# Altium PCB PA_Channel_RF2_NPTB00004A.PcbDoc
Units mm, origin at the board's own origin, x right, y up, seen from the top; angles counter-clockwise.
Board outline 40.51 x 29.51 mm, 2 copper layers (Top Layer, Bottom Layer), stack 1.071 mm thick; 25 components, 16 nets, 76 pads, 253 vias.
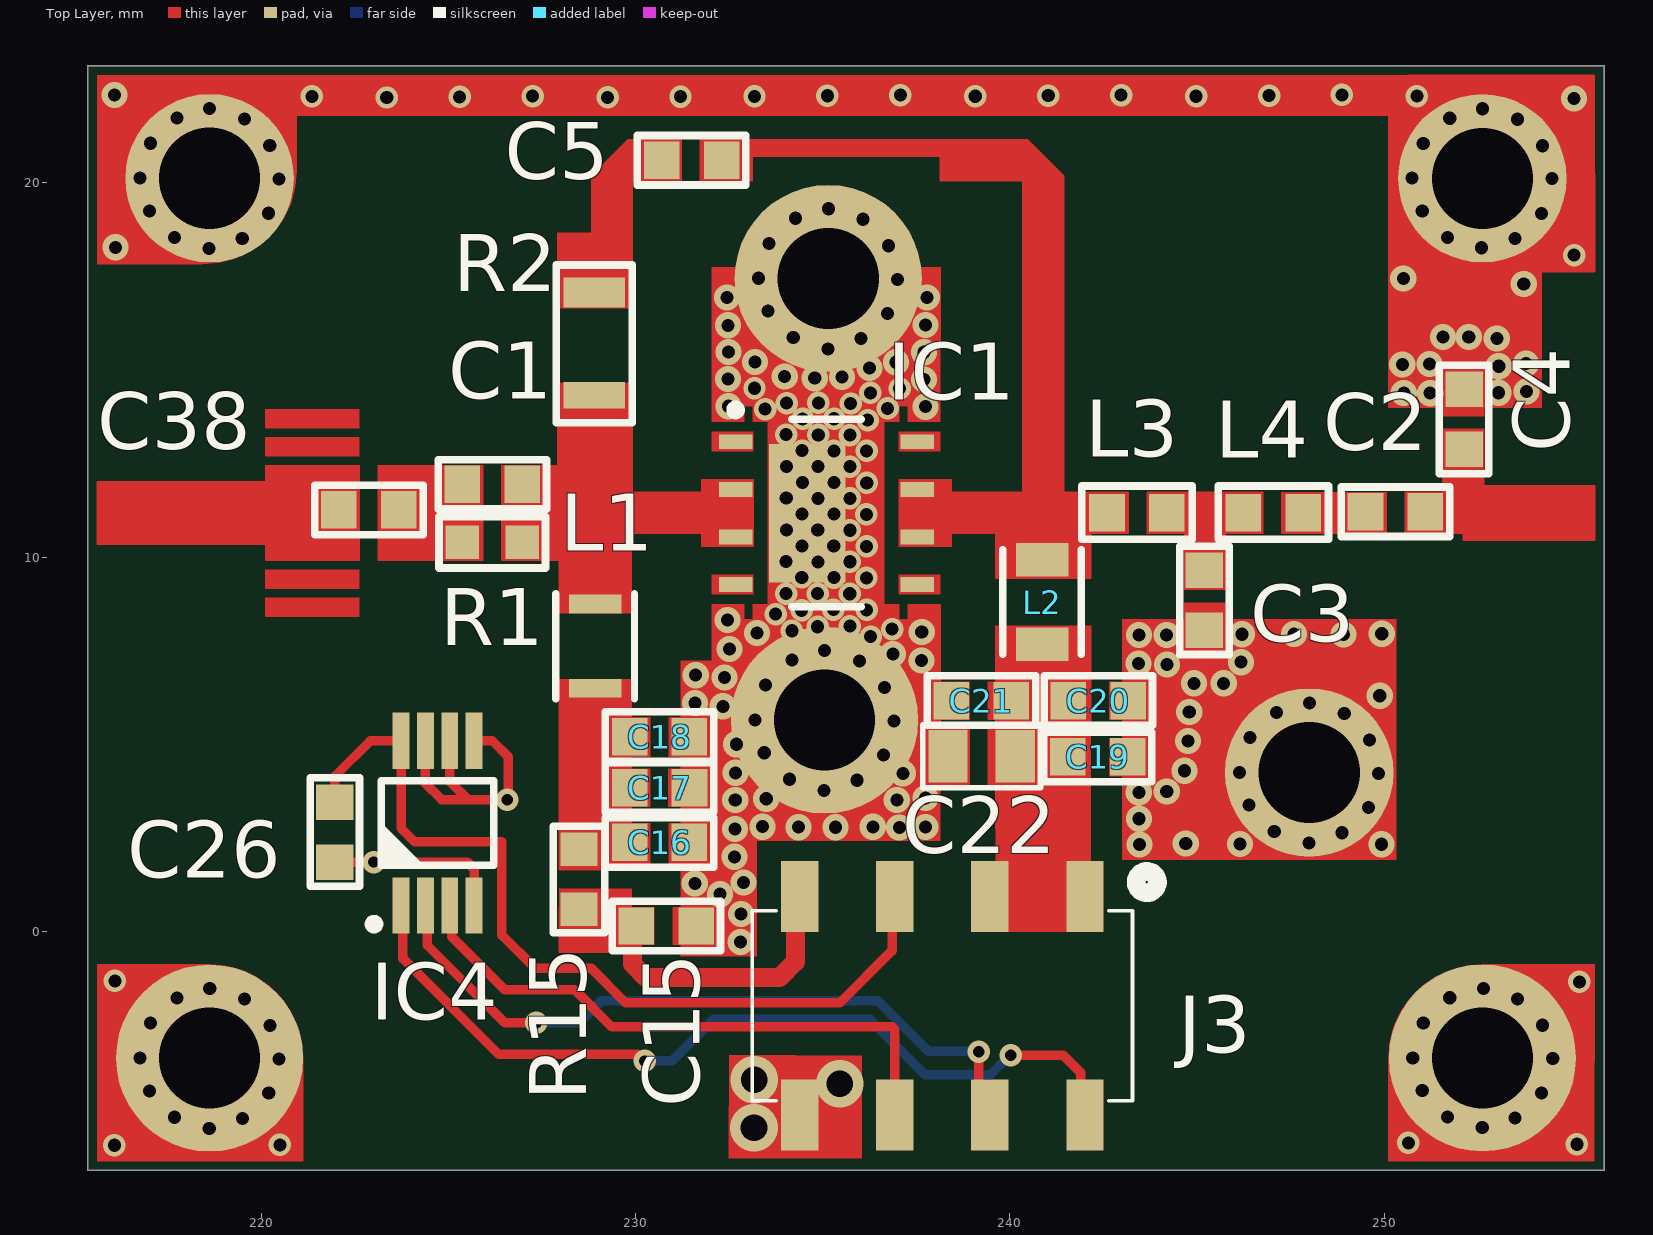
[diagram p0: Top Layer view]
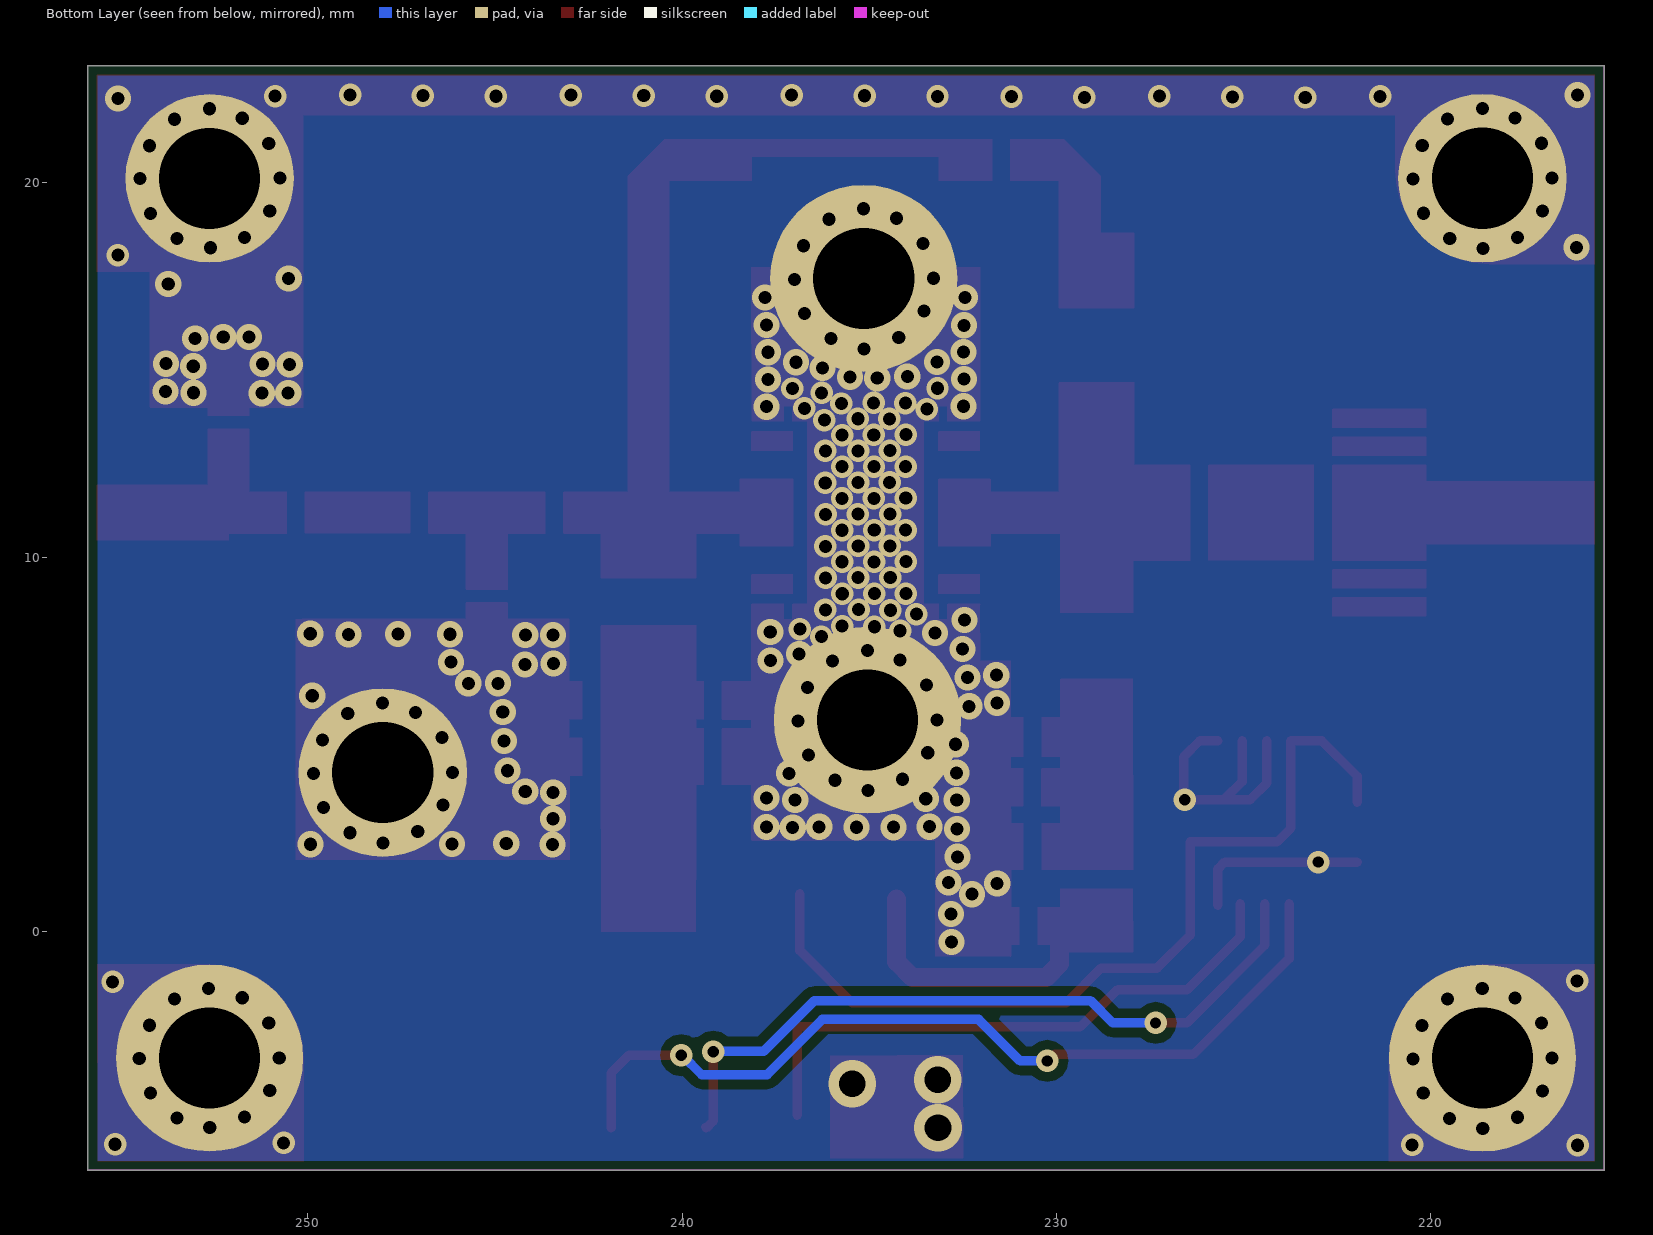
[diagram p1: Bottom Layer view, seen from below]
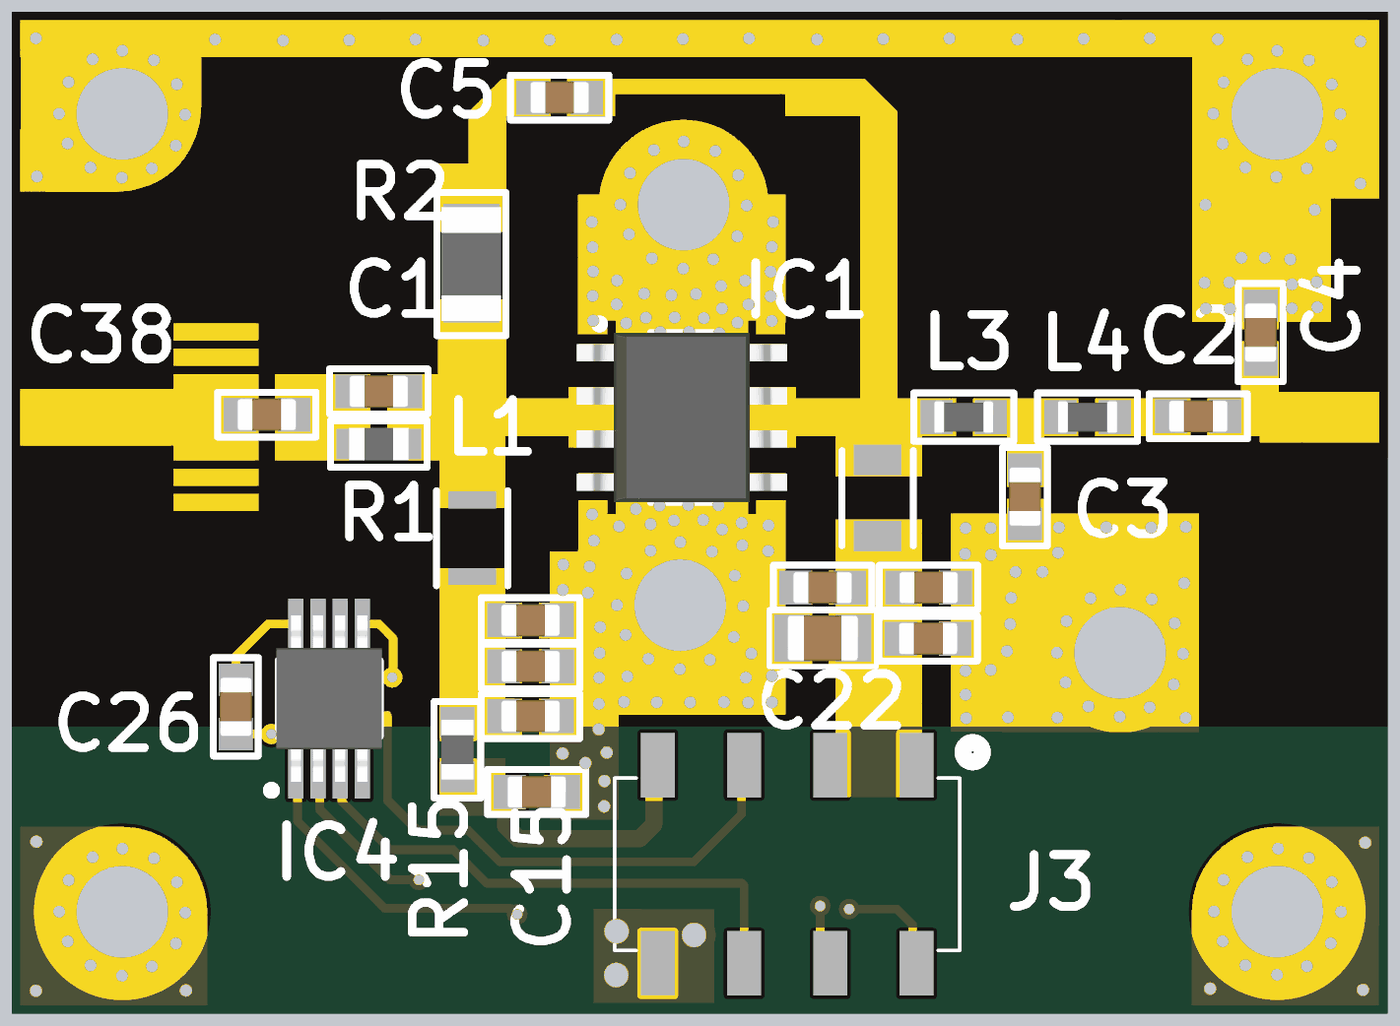
[diagram p2: 3D render of the assembled board from above, using the file's embedded part models]

## Layer stack, top to bottom
Top Solder: solder mask 0.0102, Solder Resist, Dk 3.5
Top Layer: signal copper 0.0356
Dielectric1: core 1, FR-4, Dk 4.8
Bottom Layer: signal copper 0.0356
Bottom Solder: solder mask 0.0102, Solder Resist, Dk 3.5

## Board outline
215.37,-6.375 ccw(c215.375,-6.375) 215.375,-6.38 255.875,-6.38 ccw(c255.875,-6.375) 255.88,-6.375 255.88,23.125 ccw(c255.875,23.125) 255.875,23.13 215.375,23.13 ccw(c215.375,23.125) 215.37,23.125

## Design rules (kind name [scope] priority, off if disabled: settings)
Clearance [All] p1: gap=0.25
HoleSize [All] p1: absolutevalues=TRUE maxlimit=5 minlimit=0.2 maxpercent=80.000 minpercent=20.000
HoleToHoleClearance [All] p1: gap=0.2 allowstackedmicrovias=TRUE
MinimumSolderMaskSliver [All] p1: minsoldermaskwidth=0
PolygonConnect [All] p1: connectstyle=Direct reliefconductorwidth=0.254 reliefentries=4 polygonreliefangle="90 Angle" airgapwidth=0.254
RoomDefinition Power_Stage_SOIC [InComponentClass('Power_Stage_SOIC')] p1: confinementstyle=ConfineIn formatcopy=TRUE lockcomponents=FALSE outline 257.024,-4.983 215.525,-4.983 215.525,23.175 257.024,23.175
RoutingVias [All] p1: holewidth=0.711 width=1.27 viastyle="Through Hole" minholewidth=0.2 minwidth=0.5 maxholewidth=0.711 maxwidth=1.27
SilkToSolderMaskClearance [IsPad] p1: minsilkscreentomaskgap=0 clearancetoexposedcopper=TRUE
SolderMaskExpansion [All] p1: expansion=0.102
Width [All] p1: maxlimit=2 minlimit=0.152 preferedwidth=0.254
26 further rules are at their usual default settings.

## Components (designator, comment, footprint, x,y, rotation, side; value= is the part's Value field where it differs from the comment)
C1 "3nF" 0603C 226.175,11.95 r0 top
C2 "270pF" 0603C 250.303,11.217 r0 top
C3 "2.7pF" 0603C 245.2,8.85 r270 top
C4 "0.7pF" 0603C 252.137,13.683 r90 top
C5 "27pF" 0603C 231.501,20.606 r0 top
C15 "4.7u" 0603C 230.825,0.15 r0 top
C16 "10n" 0603C 230.643,2.383 r0 top
C17 "1n" 0603C 230.645,3.848 r0 top
C18 "100p" 0603C 230.643,5.209 r0 top
C19 "10n" 0603C 242.35,4.669 r0 top
C20 "1n" 0603C 242.364,6.171 r0 top
C21 "100p" 0603C 239.241,6.171 r180 top
C22 "10u/50V" 0805C 239.248,4.683 r180 top
C26 "10n" 0603C 221.969,2.658 r90 top
C38 "220p" 0603C 222.879,11.266 r0 top
IC1 "NPTB00004A" SOIC127P610X150_HS-8N 235.101,11.181 r0 top
IC4 "MCP9801-M/MS" SOP65P490X110-8N 224.715,2.9 r90 top
J3 "ZL264-8DG" ZL264-8DG 238.2,-1.98 r180 top locked
L1 "1uH" INDP2520X18L#1 228.925,7.625 r90 top
L2 "1uH" INDP2520X18L#2 240.863,8.805 r90 top
L3 "5.7nH" 0603L 243.398,11.193 r0 top
L4 "7.2nH" 0603L 247.042,11.193 r0 top
R1 "15" 0603R#1 226.175,10.4 r0 top
R2 "470" 1206 228.9,15.7 r90 top
R15 "33" 0603R#2 228.493,1.397 r270 top

## Footprints (in the part's own frame and the unit in brackets; to place one, negate y for a bottom-side part, rotate by r counter-clockwise, add the part's x,y. Pads: shape width x height; smd on the part's side, far side on the other; paste and mask are expansions set on the pad)
0603C [mm]
  rect 0.95x1 smd: 1(-0.8,0) 2(0.8,0)
  silkscreen extent -1.45,-0.66 1.45,0.66, body extent -0.87,-0.47 0.88,0.48, height 0.87
0603L [mm]
  rect 0.95x1 smd: 1(-0.8,0) 2(0.8,0)
  silkscreen extent -1.47,-0.71 1.47,0.71, body extent -0.87,-0.47 0.88,0.48, height 0.7
0603R#1 [mm]
  rect 0.9x0.9 smd: 1(-0.8,0) 2(0.8,0)
  silkscreen extent -1.42,-0.69 1.42,0.69, body extent -0.87,-0.47 0.88,0.48, height 0.55
0603R#2 [mm]
  rect 0.9x1 smd: 1(-0.8,0) 2(0.8,0)
  silkscreen extent -1.42,-0.69 1.42,0.69, body extent -0.87,-0.47 0.88,0.48, height 0.55
0805C [mm]
  rect 1.05x1.4 smd: 1(-0.9,0) 2(0.9,0)
  silkscreen extent -1.57,-0.84 1.57,0.84, body extent -1.05,-0.67 1.05,0.68, height 1.25
1206 [mm]
  rect 0.7x1.65 smd: 1(-1.372,0)
  rect 0.8x1.65 smd: 2(1.372,0)
  silkscreen extent -2.11,-1.02 2.11,1.02, body extent -1.67,-0.87 1.68,0.88, height 0.65
INDP2520X18L#1 [mm] "Precision Wire Wound Inductor, 2-Leads, Body 2.5x2.0mm, IPC High Density"
  rect 0.5x1.4 smd: 1(-1.125,0) 2(1.125,0)
  silkscreen extent -1.4,-1.05 1.4,1.05, body extent -1.35,-1.05 1.35,1.05, height 1.8
INDP2520X18L#2 [mm] "Precision Wire Wound Inductor, 2-Leads, Body 2.5x2.0mm, IPC High Density"
  rect 0.9x1.4 smd: 1(-1.125,0) 2(1.125,0)
  silkscreen extent -1.4,-1.05 1.4,1.05, body extent -1.35,-1.05 1.35,1.05, height 1.8
SOIC127P610X150_HS-8N [mm] "SOIC, 8-Leads, Body 5.0x3.9mm (max), Pitch 1.27mm, IPC Medium Density"
  rect 0.9x0.4 smd: 1(-2.425,1.905) 2(-2.425,0.635) 3(-2.425,-0.635) 4(-2.425,-1.905) 5(2.425,-1.905) 6(2.425,-0.635) 7(2.425,0.635) 8(2.425,1.905)
  rect 2.05x3.7 smd: 9(-0.508,0)
  silkscreen extent -2.55,-2.5 0.93,2.88, body extent -3.1,-2.5 3.1,2.5, height 1.75
SOP65P490X110-8N [mm] "SOP, 0.65mm pitch; 8 pin, 3.00mm W X 3.00mm L X 1.10mm H body, IPC Medium Density"
  rect 1.5x0.45 smd: 1(-2.2,0.975) 2(-2.2,0.325) 3(-2.2,-0.325) 4(-2.2,-0.975) 5(2.2,-0.975) 6(2.2,-0.325) 7(2.2,0.325) 8(2.2,0.975)
  silkscreen extent -2.82,-1.5 1.12,1.82, body extent -2.45,-1.55 2.45,1.55, height 1.1
ZL264-8DG [mm]
  rect 1x1.9 smd: 1(-3.81,-2.921) 2(-3.81,2.921) 3(-1.27,-2.921) 4(-1.27,2.921) 5(1.27,-2.921) 6(1.27,2.921) 7(3.81,-2.921) 8(3.81,2.921)
  silkscreen extent -5.74,-3.59 5.08,2.54, body extent -5.08,-3.56 5.08,3.56, height 7.5

## Part data
C1 C2 C3 C4 C5 C15 C16 C17 C18 C19 C20 C21 C26 C38: library part CAP_SMD_0603, "Capacitor SMD"
C22: library part CAP_SMD_0805, "Capacitor SMD"
IC1: library part RF_NPTB00004A, "GaN Wideband Transistor 28 V, 5 W DC  - 6 GHz"
IC4: "2-Wire High-Accuracy Temperature Sensor"
J3: library part "CON_2X4 2.54 SMT FEM", "2.54mm pitch connector"
L2: "100uH, 60mA, 21R"
L3 L4: library part L_0603, "SMT inductor"
R1 R2 R15: library part RES_0603, "SMD Resistor"

## Free pads (board coordinates)
  round 5 hole 2.7 unplated: 2(235.05,5.65) 6(218.625,-3.38) 6(252.625,-3.375) 13(235.15,17.45)
  round 4.5 hole 2.7 unplated: 4(248,4.25) 6(218.623,20.125) 6(252.625,20.122)

## Via types
v1: diameter 0.7, hole 0.35, Top Layer to Bottom Layer, tented both sides, 168 vias
v2: diameter 0.6, hole 0.35, Top Layer to Bottom Layer, tented both sides, 76 vias
v3: diameter 0.6, hole 0.3, Top Layer to Bottom Layer, tented both sides, 4 vias
v4: diameter 1.27, hole 0.711, Top Layer to Bottom Layer, tented both sides, 3 vias
v5: diameter 0.6, hole 0.3, Top Layer to Bottom Layer, 2 vias

## Nets (pads, with @x,y where several pads share a name; then routed paths per layer and width w, separated by ;. In a path a pad name is that pad's centre, name@x,y a point inside that pad or via, vN(x,y) a via of type N, cw(c..) or ccw(c..) an arc to the next point about the centre after c; other vN are vias at no path point)
ALERT: IC4.3 J3.6 | length 16
  Top Layer w0.254: IC4.3@225.087,0.739 225.087,-0.131 226.505,-1.549 228.371,-1.549 229.362,-2.54 236.855,-2.54 236.931,-2.616 J3.6@236.931,-4.902
GND: C3.2 C4.2 C15.2 C16.2 C17.2 C18.2 C19.2 C20.2 C21.2 C22.2 C26.1 IC1.9 IC4.4 IC4.5 IC4.6 IC4.7 J3.8 pad.2 pad.4 pad.6 pad.13 | length 297.6
  Top Layer w0.01: pad.6@217.207,21.808 250.128,21.808 250.128,14.004 252.628,14.004 ; 220.236,22.08 222.436,22.08 227.456,22.08 228.536,22.08 ; 221.128,22.883 215.628,22.883 250.636,22.883 250.636,22.862 250.878,22.883 255.628,22.883 255.628,17.633 254.205,17.633 254.205,14.004 252.628,14.004 ; 226.135,22.084 228.335,22.084 233.355,22.084 234.435,22.084 ; 229.928,21.808 229.928,22.882 231.228,22.882 231.228,21.808 ; 230.893,2.149 231.893,2.149 231.893,3.149 ; 230.893,5.549 231.893,5.549 231.893,4.549 ; 231.217,-0.669 231.217,7.228 232.048,7.228 232.048,8.739 232.903,8.739 232.903,8.337 233.153,8.337 233.153,8.739 237.043,8.739 237.043,8.337 237.293,8.337 237.293,8.739 238.148,8.739 238.148,2.434 233.65,2.434 ; 231.728,21.808 231.728,22.882 ; 231.893,-0.351 C15.2@231.893,0.649 ; 231.898,22.55 232.978,22.55 237.998,22.55 240.198,22.55 ; 232.048,14.844 233.128,14.844 ; 232.048,17.334 pad.13@233.128,17.334 ; 232.048,21.808 232.048,22.882 ; pad.13@233.128,17.734 232.048,17.734 232.048,13.639 232.903,13.639 232.903,14.041 233.153,14.041 233.153,13.639 237.043,13.639 237.043,14.041 237.293,14.041 237.293,13.639 238.148,13.639 ; 233.128,21.808 233.128,22.882 ; 233.553,8.739 233.553,13.639 ; 236.643,8.739 236.643,13.639 ; 237.797,22.551 238.877,22.551 243.897,22.551 246.097,22.551 ; 238.148,21.808 238.148,22.882 ; 240.348,21.808 240.348,22.882 ; 243.695,22.554 244.775,22.554 249.795,22.554 251.995,22.554 ; pad.6@252.628,18.933 252.628,14.004 ; 230.893,3.349 231.893,3.349 231.893,4.349 230.893,4.349 230.893,3.349 ; IC1.9@233.953,9.604 233.953,12.774 236.243,12.774 236.243,9.604 IC1.9@233.953,9.604 ; 237.928,3.919 237.928,5.419 238.928,5.419 238.928,3.919 237.928,3.919 ; 237.928,5.669 237.928,6.669 238.928,6.669 238.928,5.669 237.928,5.669 ; 242.668,4.169 242.668,5.169 243.668,5.169 243.668,4.169 242.668,4.169 ; 242.668,5.669 243.668,5.669 243.668,6.669 242.668,6.669 242.668,5.669 ; 243.016,2.19 243.016,8.347 250.154,8.347 250.154,2.19 243.016,2.19 ; 244.668,8.279 244.668,8.779 245.768,8.779 245.768,8.279 244.668,8.279 ; C3.2@245.018,7.879 245.418,7.879 245.418,8.679 245.018,8.679 C3.2@245.018,7.879 ; 251.568,13.784 251.568,14.284 252.668,14.284 252.668,13.784 251.568,13.784 ; 251.918,13.884 252.318,13.884 252.318,14.684 251.918,14.684 251.918,13.884
  Top Layer w0.254: C26.1 v5(223.01,1.858) 225.509,1.858 225.69,1.677 IC4.4 ; IC4.7 224.39,3.96 224.825,3.525 225.525,3.525 ; IC4.6 225.04,4.01 225.525,3.525 ; IC4.5 226.175,5.1 226.6,4.675 226.6,3.525 v5@226.575,3.5 ; v5(226.575,3.525) 225.525,3.525
  Top Layer w1: v4(233.167,-5.243) J3.8@234.272,-5.243
  other v1: 232.808,-0.274 232.819,0.474 232.257,1.001 231.587,1.284 232.886,1.312 232.65,1.998 243.468,2.325 244.7,2.351 246.154,2.342 249.931,2.334 247.99,2.369 248.873,2.643 247.066,2.671 232.657,2.745 237.05,2.785 233.394,2.804 234.36,2.79 235.344,2.789 236.341,2.799 237.752,2.791 243.451,3.016 249.579,3.316 246.393,3.377 232.666,3.517 236.983,3.518 233.494,3.55 237.747,3.57 243.447,3.719 244.193,3.745 235.04,3.769 235.923,4.043 234.116,4.071 237.143,4.229 249.854,4.225 232.677,4.242 246.14,4.254 244.669,4.297 236.629,4.716 233.443,4.777 232.695,5.005 244.763,5.095 249.608,5.123 246.421,5.184 236.904,5.625 233.19,5.654 248.934,5.829 247.127,5.858 244.794,5.868 232.334,6.019 231.594,6.106 248.004,6.11 249.884,6.302 236.658,6.523 233.471,6.584 244.921,6.633 245.714,6.633 232.383,6.79 231.609,6.851 244.197,7.132 243.436,7.164 246.175,7.198 235.984,7.229 237.641,7.247 234.177,7.258 236.875,7.419 235.054,7.51 232.51,7.551 243.454,7.925 244.191,7.925 248.917,7.94 246.201,7.944 247.591,7.948 249.936,7.957 233.25,7.976 237.648,8.003 232.459,8.328 232.486,14.035 237.746,14.024 250.526,14.389 251.23,14.384 253.057,14.395 253.806,14.429 232.474,14.761 237.712,14.75 234.79,14.785 235.515,14.819 233.987,14.83 236.252,15.054 253.063,15.104 250.486,15.15 251.213,15.161 253.789,15.172 233.19,15.217 236.959,15.211 232.486,15.482 237.712,15.476 235.14,15.569 236.023,15.843 253.011,15.842 234.216,15.871 251.57,15.887 252.262,15.887 232.469,16.197 237.751,16.208 236.729,16.516 233.543,16.577 232.449,16.938 237.785,16.94 253.73,17.297 237.004,17.425 233.29,17.454 250.513,17.448 218.613,18.244 252.6,18.268 216.111,18.28 236.758,18.323 233.571,18.384 219.495,18.518 253.498,18.514 217.689,18.546 251.691,18.543 236.084,19.029 234.277,19.058 220.202,19.192 254.204,19.188 217.015,19.253 251.017,19.249 235.154,19.31 220.476,20.101 216.763,20.129 250.744,20.132 254.485,20.118 254.232,20.995 220.23,20.998 217.043,21.059 251.046,21.056 219.556,21.705 253.559,21.701 217.75,21.733 251.752,21.729 218.626,21.985 252.629,21.982 255.075,22.258 216.084,22.352
  other v2: 216.082,-5.706 220.502,-5.697 255.15,-5.68 250.65,-5.643 255.216,-1.344 216.095,-1.315 236.284,7.883 234.179,8.038 236.858,8.079 234.868,8.145 235.727,8.163 233.743,8.483 234.44,8.584 236.175,8.595 235.289,8.604 234.026,9.029 234.866,9.032 235.726,9.027 234.444,9.46 235.302,9.457 236.172,9.449 234.023,9.884 234.873,9.877 235.727,9.88 235.298,10.302 236.174,10.292 234.453,10.307 234.031,10.725 234.871,10.728 235.731,10.723 234.449,11.156 235.307,11.153 236.171,11.147 234.878,11.573 234.028,11.58 235.732,11.576 234.458,12.003 235.303,11.998 236.179,11.988 234.03,12.423 234.877,12.424 235.73,12.423 235.299,12.841 236.176,12.843 234.452,12.85 234.882,13.27 235.727,13.263 234.027,13.277 236.202,13.663 234.464,13.697 235.309,13.701 233.462,13.958 236.736,13.976 235.746,14.108 234.038,14.121 234.886,14.126 236.278,14.392 233.18,14.516 237.059,14.509 255.074,18.07 223.357,22.283 229.256,22.287 221.356,22.314 225.305,22.3 227.255,22.318 231.204,22.304 233.181,22.313 239.078,22.316 244.977,22.317 235.129,22.33 241.028,22.331 246.926,22.334 250.875,22.32 237.077,22.347 242.976,22.348 248.874,22.351
  other v4: 235.458,-4.064 233.177,-3.953
NetC1_1: C1.1 C38.2 R1.1 | length 10.7
  Top Layer w0.01: 223.128,9.919 223.128,12.459 225.928,12.459 225.928,9.919 223.128,9.919
NetC1_2: C1.2 IC1.2 IC1.3 L1.2 R1.2 R2.1 | length 54.1
  Top Layer w0.01: 227.928,9.919 226.428,9.919 226.428,12.459 227.928,12.459 ; 227.928,9.919 227.928,12.459 ; 227.928,9.919 229.893,9.919 ; 227.928,9.919 227.928,12.459 ; 227.928,12.459 229.928,12.459 ; 227.928,12.459 227.928,14.659 229.928,14.659 229.928,12.459 ; 227.928,12.459 229.928,12.459 ; 229.893,9.919 229.893,8.519 227.963,8.519 227.963,9.919 229.893,9.919 ; 229.893,9.919 229.893,10.639 229.928,10.639 ; 229.928,10.639 229.928,12.459 ; 229.928,10.639 231.768,10.639 231.768,11.739 229.928,11.739 229.928,10.639 ; 232.048,10.299 231.768,10.299 231.768,12.079 232.048,12.079 ; 232.048,10.299 232.048,12.079 ; 232.048,10.299 233.153,10.299 233.153,12.079 232.048,12.079 ; 232.048,10.299 232.048,12.079 ; 232.048,10.349 232.048,10.759 233.153,10.759 233.153,10.349 232.048,10.349 ; 232.048,11.619 232.048,12.029 233.153,12.029 233.153,11.619 232.048,11.619
NetC2_1: C2.1 L4.2 | length 7.8
  Top Layer w0.01: 247.268,10.639 250.068,10.639 250.068,11.739 247.268,11.739 247.268,10.639
NetC2_2: C2.2 C4.1 | length 23.4
  Top Layer w0.01: 251.568,10.639 252.118,10.639 252.118,10.454 252.668,10.454 ; 251.568,10.639 251.568,11.924 ; 251.568,10.639 250.568,10.639 250.568,11.739 251.568,11.739 251.568,10.639 ; 251.568,11.924 252.668,11.924 ; 251.568,11.924 251.568,13.424 252.668,13.424 252.668,11.924 ; 251.568,11.924 252.668,11.924 ; 252.668,10.454 252.668,11.924 ; 252.668,10.454 252.668,11.924 ; 252.668,10.454 255.628,10.454 255.628,11.924 252.668,11.924
NetC3_1: C3.1 L3.2 L4.1 | length 18
  Top Layer w0.01: 244.668,10.639 245.768,10.639 ; 244.668,10.639 244.668,9.139 245.768,9.139 245.768,10.639 ; 244.668,10.639 244.668,11.739 ; 244.668,10.639 245.768,10.639 ; 244.668,10.639 243.668,10.639 243.668,11.739 244.668,11.739 ; 244.668,10.639 244.668,11.739 ; 244.668,11.739 245.768,11.739 ; 245.768,10.639 246.768,10.639 246.768,11.739 245.768,11.739 ; 245.768,10.639 245.768,11.739 ; 245.768,10.639 245.768,11.739
NetC5_1: C5.1 R2.2 | length 21.6
  Top Layer w0.01: 228.828,20.059 229.928,20.059 ; 228.828,20.059 228.828,20.191 229.796,21.159 229.928,21.159 ; 228.828,20.059 229.928,20.059 ; 228.828,20.059 228.828,18.659 229.928,18.659 ; 229.928,18.659 229.928,16.659 227.928,16.659 227.928,18.659 229.928,18.659 ; 229.928,18.659 229.928,20.059 ; 229.928,20.059 229.928,21.159 ; 229.928,20.059 231.228,20.059 231.228,21.159 229.928,21.159 ; 229.928,20.059 229.928,21.159
NetC5_2: C5.2 IC1.6 IC1.7 L2.2 L3.1 | length 86.9
  Top Layer w0.01: 232.048,20.059 233.128,20.059 233.128,21.159 ; 232.048,20.059 232.048,21.159 ; 232.048,20.059 231.728,20.059 231.728,21.159 232.048,21.159 ; 232.048,20.059 232.048,21.159 ; 232.048,21.159 233.128,21.159 ; 233.128,21.159 238.148,21.159 ; 233.128,21.159 233.128,20.709 238.148,20.709 238.148,21.159 ; 238.148,10.299 237.043,10.299 237.043,12.079 238.148,12.079 ; 238.148,10.299 238.148,12.079 ; 238.148,10.299 238.448,10.299 238.448,12.079 238.148,12.079 ; 238.148,10.299 238.148,12.079 ; 238.148,21.159 240.348,21.159 ; 238.148,21.159 238.148,20.059 240.348,20.059 ; 239.628,10.639 242.168,10.639 ; 239.628,10.639 239.628,11.739 ; 239.628,10.639 238.448,10.639 238.448,11.739 239.628,11.739 ; 239.628,10.639 239.628,11.739 ; 239.628,10.639 242.168,10.639 ; 239.628,10.639 239.628,9.439 242.168,9.439 242.168,10.639 ; 239.628,11.739 242.168,11.739 ; 240.348,20.059 241.448,20.059 ; 240.348,20.059 240.348,11.739 241.448,11.739 241.448,20.059 ; 240.348,20.059 240.348,21.159 ; 240.348,20.059 241.448,20.059 ; 240.348,20.059 240.348,21.159 ; 240.348,21.159 240.48,21.159 241.448,20.191 241.448,20.059 ; 242.168,10.639 242.168,11.739 ; 242.168,10.639 242.168,11.739 ; 242.168,10.639 243.168,10.639 243.168,11.739 242.168,11.739 ; 237.043,10.349 237.043,10.759 238.148,10.759 238.148,10.349 237.043,10.349 ; 237.043,11.619 237.043,12.029 238.148,12.029 238.148,11.619 237.043,11.619
NetC16_1: C16.1 C17.1 C18.1 L1.1 R15.1 | length 28.6
  Top Layer w0.01: 230.393,2.149 C16.1@229.893,2.149 ; 230.393,5.549 C18.1@229.893,5.549 ; 227.963,2.149 227.963,1.649 229.893,1.649 C16.1@229.893,2.149 ; 227.963,2.149 C16.1@229.893,2.149 ; 227.963,2.149 227.963,3.149 ; 227.963,3.149 227.963,3.349 ; 227.963,3.149 229.893,3.149 ; 227.963,3.349 227.963,4.349 ; 227.963,3.349 C17.1@229.893,3.349 ; 227.963,4.349 229.893,4.349 ; 227.963,4.349 227.963,4.549 ; 227.963,4.549 229.893,4.549 ; 227.963,4.549 227.963,5.549 ; 227.963,5.549 227.963,6.739 229.893,6.739 C18.1@229.893,5.549 ; 227.963,5.549 C18.1@229.893,5.549 ; C16.1@229.893,2.149 229.893,3.149 ; 229.893,3.149 C17.1@229.893,3.349 ; C17.1@229.893,3.349 229.893,4.349 ; C17.1@229.893,3.349 230.393,3.349 230.393,4.349 229.893,4.349 ; 229.893,4.349 229.893,4.549 ; 229.893,4.549 C18.1@229.893,5.549
NetC38_1: C38.1 | length 31.8
  Top Layer w0.01: 215.628,10.354 215.628,12.024 ; 215.628,10.354 218.628,10.354 218.628,12.024 215.628,12.024 ; 215.628,10.354 215.628,12.024 ; 215.628,10.354 220.128,10.354 220.128,12.024 215.628,12.024 ; 220.128,9.919 220.128,12.459 222.628,12.459 222.628,9.919 220.128,9.919
P3V3: C26.2 IC4.8 J3.5 | length 23.8
  Top Layer w0.254: C26.2 221.969,4.15 222.919,5.1 IC4.8 223.74,2.76 224.1,2.4 226.425,2.4 226.43,2.405 226.43,-0.091 227.314,-0.975 228.813,-0.975 229.743,-1.905 235.458,-1.905 236.855,-0.508 J3.5@236.855,1.016
SCK: IC4.2 J3.4 | length 19.7
  Top Layer w0.254: IC4.2@224.437,0.739 224.437,-0.363 226.512,-2.438 v3(227.355,-2.438) 227.381,-2.438 v3@227.406,-2.413 ; v3(239.17,-3.208) 239.17,-5.061 239.352,-5.243 J3.4@239.374,-5.221
  Bottom Layer w0.254: v3(227.355,-2.438) 228.498,-2.438 229.094,-1.843 236.469,-1.843 237.819,-3.193 v3@239.2,-3.193
SDA: IC4.1 J3.2 | length 23.7
  Top Layer w0.254: IC4.1@223.787,0.739 223.787,-0.721 226.343,-3.277 230.048,-3.277 v3@230.251,-3.48 ; v3(240.025,-3.3) 241.425,-3.3 241.892,-3.767 J3.2@241.892,-5.243
  Bottom Layer w0.254: v3(230.251,-3.454) 230.975,-3.454 232.082,-2.347 236.26,-2.347 237.735,-3.822 239.48,-3.822 v3@239.995,-3.307 ; v3@240.006,-3.319 240.012,-3.313 240.025,-3.325 v3(240.025,-3.3)
VCC_PWRAMP: C19.1 C20.1 C21.1 C22.1 J3.1 J3.3 L2.1 | length 42
  Top Layer w0.01: 239.628,3.919 242.168,3.919 ; 239.628,3.919 239.628,5.419 ; 239.628,3.919 239.428,3.919 239.428,5.419 239.628,5.419 ; 239.628,3.919 239.628,5.419 ; 239.628,3.919 239.628,2.749 242.168,2.749 242.168,3.919 ; 239.628,3.919 242.168,3.919 ; 239.628,5.419 242.168,5.419 ; 239.628,5.419 239.628,5.669 ; 239.628,5.419 242.168,5.419 ; 239.628,5.669 242.168,5.669 ; 239.628,5.669 C21.1@239.628,6.669 ; 239.628,5.669 242.168,5.669 ; 239.628,5.669 239.428,5.669 239.428,6.669 C21.1@239.628,6.669 ; 239.628,5.669 C21.1@239.628,6.669 ; C21.1@239.628,6.669 239.628,8.169 242.168,8.169 242.168,6.669 ; C21.1@239.628,6.669 242.168,6.669 ; C21.1@239.628,6.669 242.168,6.669 ; 242.168,3.919 242.168,5.419 ; 242.168,5.419 242.168,5.669 ; 242.168,5.669 242.168,6.669
VCC_PWRAMPIN: C15.1 J3.7 R15.2 | length 14.4
  Top Layer w0.01: 227.963,-0.551 229.893,-0.551 229.893,-0.351 227.963,-0.351 227.963,0.649 C15.1@229.893,0.649
  Top Layer w0.508: C15.1@229.916,0.157 229.916,-0.862 230.28,-1.226 233.851,-1.226 234.272,-0.805 J3.7@234.272,0.869
pads on no net: IC1.1 IC1.4 IC1.5 IC1.8
copper on no net: | length 63.1
  Top Layer w0.01: -59.9,-120.25 -59.866,-119.859 -59.764,-119.48 -59.599,-119.125 -59.374,-118.804 -59.096,-118.526 -58.775,-118.301 -58.42,-118.136 -58.041,-118.034 -57.65,-118 -57.259,-118.034 -56.88,-118.136 -56.525,-118.301 -56.204,-118.526 -55.926,-118.804 -55.701,-119.125 -55.536,-119.48 -55.434,-119.859 -55.4,-120.25 -55.434,-120.641 -55.536,-121.02 -55.701,-121.375 -55.926,-121.696 -56.204,-121.974 -56.525,-122.199 -56.88,-122.364 -57.259,-122.466 -57.65,-122.5 -58.041,-122.466 -58.42,-122.364 -58.775,-122.199 -59.096,-121.974 -59.374,-121.696 -59.599,-121.375 -59.764,-121.02 -59.866,-120.641 -59.9,-120.25 ; 220.128,8.427 220.128,8.923 222.628,8.923 222.628,8.427 220.128,8.427 ; 220.128,9.173 220.128,9.669 222.628,9.669 222.628,9.173 220.128,9.173 ; 220.128,12.709 220.128,13.205 222.628,13.205 222.628,12.709 220.128,12.709 ; 220.128,13.455 220.128,13.951 222.628,13.951 222.628,13.455 220.128,13.455 ; 232.048,9.029 233.153,9.029 233.153,9.539 232.048,9.539 232.048,9.029 ; 232.048,9.079 232.048,9.489 233.153,9.489 233.153,9.079 232.048,9.079 ; 232.048,12.839 233.153,12.839 233.153,13.349 232.048,13.349 232.048,12.839 ; 232.048,12.889 232.048,13.299 233.153,13.299 233.153,12.889 232.048,12.889 ; 237.043,9.029 238.148,9.029 238.148,9.539 237.043,9.539 237.043,9.029 ; 237.043,9.079 237.043,9.489 238.148,9.489 238.148,9.079 237.043,9.079 ; 237.043,12.839 238.148,12.839 238.148,13.349 237.043,13.349 237.043,12.839 ; 237.043,12.889 237.043,13.299 238.148,13.299 238.148,12.889 237.043,12.889
  other v1: 218.616,-5.261 252.621,-5.235 219.498,-4.988 253.498,-4.982 217.692,-4.959 251.691,-4.954 220.205,-4.314 254.204,-4.308 217.018,-4.253 251.017,-4.247 220.479,-3.405 216.765,-3.376 250.765,-3.371 254.506,-3.384 220.233,-2.507 254.232,-2.502 217.046,-2.446 251.046,-2.441 219.559,-1.801 253.559,-1.795 217.753,-1.773 251.752,-1.767 218.629,-1.52 252.65,-1.521

## Polygon pours and split planes (outlines as drawn)
no net on Top Layer "Top Layer-No Net 7" (none, pour order 19): 246.934,3.653 246.853,3.826 246.804,4.01 246.787,4.2 246.804,4.39 246.853,4.574 246.934,4.747 247.043,4.904 247.178,5.039 247.335,5.148 247.508,5.229 247.692,5.278 247.882,5.295 248.072,5.278 248.256,5.229 248.429,5.148 248.586,5.039 248.721,4.904 248.83,4.747 248.911,4.574 248.96,4.39 248.977,4.2 248.96,4.01 248.911,3.826 248.83,3.653 248.721,3.496 248.586,3.361 248.429,3.252 248.256,3.171 248.072,3.122 247.882,3.105 247.692,3.122 247.508,3.171 247.335,3.252 247.178,3.361 247.043,3.496
no net on Top Layer "Top Layer-No Net 7" (none, pour order 13): 217.674,19.6 217.594,19.773 217.545,19.957 217.528,20.147 217.545,20.337 217.594,20.522 217.674,20.695 217.784,20.851 217.919,20.986 218.075,21.096 218.248,21.176 218.433,21.225 218.623,21.242 218.813,21.225 218.997,21.176 219.17,21.096 219.326,20.986 219.461,20.851 219.571,20.695 219.652,20.522 219.7,20.337 219.717,20.147 219.7,19.957 219.652,19.773 219.571,19.6 219.461,19.444 219.326,19.309 219.17,19.199 218.997,19.118 218.813,19.07 218.623,19.053 218.433,19.07 218.248,19.118 218.075,19.199 217.919,19.309 217.784,19.444
no net on Top Layer "Top Layer-No Net 7" (none, pour order 12): 217.677,-3.905 217.597,-3.732 217.548,-3.548 217.531,-3.358 217.548,-3.168 217.597,-2.984 217.677,-2.811 217.787,-2.654 217.922,-2.519 218.078,-2.41 218.251,-2.329 218.435,-2.28 218.625,-2.263 218.816,-2.28 219,-2.329 219.173,-2.41 219.329,-2.519 219.464,-2.654 219.574,-2.811 219.654,-2.984 219.703,-3.168 219.72,-3.358 219.703,-3.548 219.654,-3.732 219.574,-3.905 219.464,-4.062 219.329,-4.197 219.173,-4.306 219,-4.387 218.816,-4.436 218.625,-4.453 218.435,-4.436 218.251,-4.387 218.078,-4.306 217.922,-4.197 217.787,-4.062
no net on Top Layer "Top Layer-No Net 7" (none, pour order 11): 253.15,-4.323 252.977,-4.403 252.793,-4.452 252.603,-4.469 252.413,-4.452 252.229,-4.403 252.056,-4.323 251.899,-4.213 251.764,-4.078 251.655,-3.922 251.574,-3.749 251.525,-3.565 251.508,-3.375 251.525,-3.184 251.574,-3 251.655,-2.827 251.764,-2.671 251.899,-2.536 252.056,-2.426 252.229,-2.346 252.413,-2.297 252.603,-2.28 252.793,-2.297 252.977,-2.346 253.15,-2.426 253.307,-2.536 253.442,-2.671 253.551,-2.827 253.632,-3 253.681,-3.184 253.698,-3.375 253.681,-3.565 253.632,-3.749 253.551,-3.922 253.442,-4.078 253.307,-4.213
no net on Top Layer "Top Layer-No Net 7" (none, pour order 10): 252.1,21.07 252.273,21.151 252.457,21.2 252.647,21.217 252.837,21.2 253.021,21.151 253.194,21.07 253.351,20.961 253.486,20.826 253.595,20.669 253.676,20.496 253.725,20.312 253.742,20.122 253.725,19.932 253.676,19.748 253.595,19.575 253.486,19.418 253.351,19.283 253.194,19.174 253.021,19.093 252.837,19.044 252.647,19.027 252.457,19.044 252.273,19.093 252.1,19.174 251.943,19.283 251.808,19.418 251.699,19.575 251.618,19.748 251.569,19.932 251.552,20.122 251.569,20.312 251.618,20.496 251.699,20.669 251.808,20.826 251.943,20.961
GND on Bottom Layer "L3-No Net" (solid, remove dead copper, pour order 34): 215.382,23.11 255.882,23.11 256.01,-6.392 215.382,-6.392

## Keep-outs
Keep-Out Layer:
  lines w0.01: 215.375,-6.375 215.375,23.125 ; 215.375,-6.375 255.875,-6.375 255.875,23.125 215.375,23.125 ; 215.375,-6.375 215.375,23.125

## Other copper
Top Layer:
  region net GND: 215.624,21.803 215.623,22.883 250.636,22.889 250.651,22.889 250.878,22.889 255.628,22.889 255.634,17.633 254.211,17.628 254.211,14.004 252.674,13.999 252.674,13.784 251.568,13.779 251.563,13.999 250.128,13.999 250.123,21.803 221.134,21.803
  region net GND: 231.212,-0.664 233.243,-0.669 233.243,2.429 238.148,2.429 238.154,8.739 237.293,8.745 237.288,8.343 237.049,8.343 237.049,8.739 233.153,8.745 233.148,8.343 232.909,8.343 232.909,8.739 232.048,8.745 232.043,7.234 231.217,7.234
  region net NetC2_1: 247.268,10.639 250.068,10.639 250.068,11.739 247.268,11.739
  region: 232.048,9.029 232.048,9.539 233.153,9.539 233.153,9.029
  region net GND: 242.668,4.169 242.668,5.169 243.668,5.169 243.668,4.169
  region net GND: 242.668,5.669 242.668,6.669 243.668,6.669 243.668,5.669
  region net GND: 237.928,3.919 238.928,3.919 238.928,5.419 237.928,5.419
  region net GND: 230.893,4.675 231.893,4.675 231.893,5.725 230.893,5.725
  region net GND: 230.893,1.65 230.893,2.9 231.893,2.9 231.893,1.65
  region net GND: 231,-0.351 231,0.649 231.893,0.649 231.893,-0.351
  region: 237.043,12.839 237.043,13.349 238.148,13.349 238.148,12.839
  region: 232.048,12.839 232.048,13.349 233.153,13.349 233.153,12.839
  region: 237.043,9.029 237.043,9.539 238.148,9.539 238.148,9.029
  region net NetC1_1: 223.128,9.919 225.928,9.919 225.928,12.459 223.128,12.459
  region: 220.128,8.427 220.128,8.923 222.628,8.923 222.628,8.427
  region: 220.128,12.709 220.128,13.205 222.628,13.205 222.628,12.709
  region: 220.128,13.455 222.628,13.455 222.628,13.951 220.128,13.951
  region: 220.128,9.173 220.128,9.669 222.628,9.669 222.628,9.173
  region net GND: 236.051,-6.066 236.051,-3.311 232.503,-3.292 232.495,-6.055
  region net GND: 243.011,1.923 250.323,1.917 250.328,8.347 243.016,8.353
  region net VCC_PWRAMP: 239.423,3.919 239.623,3.914 239.623,2.749 239.636,-0.006 242.168,-0.006 242.168,2.744 242.174,8.169 239.628,8.175 239.623,6.675 239.428,6.675 239.423,5.669 239.623,5.664 239.623,5.425 239.428,5.425
  region net VCC_PWRAMPIN: 227.958,-0.551 229.893,-0.556 229.899,-0.356 230.497,-0.356 230.502,0.648 229.899,0.655 229.899,1.149 227.963,1.155
  region net NetC16_1: 227.958,1.649 229.893,1.644 230.391,1.649 230.397,2.898 229.899,2.904 229.899,3.344 230.393,3.344 230.399,4.349 229.899,4.355 229.899,4.675 230.394,4.675 230.4,5.723 229.899,5.729 229.899,6.739 227.963,6.745
  region net GND: 232.043,13.639 232.903,13.634 232.909,14.036 233.148,14.036 233.148,13.639 237.043,13.634 237.049,14.036 237.288,14.036 237.288,13.639 238.148,13.634 238.152,17.744 232.903,17.75 232.043,17.75
  region: 250.108,-6.131 255.62,-6.133 255.63,-0.875 252.613,-0.875 252.179,-0.913 251.757,-1.027 251.361,-1.211 251.003,-1.461 250.695,-1.77 250.444,-2.128 250.259,-2.523 250.146,-2.945 250.108,-3.38
  region: 215.619,-6.131 221.123,-6.133 221.128,-3.378 221.09,-2.943 220.977,-2.521 220.793,-2.125 220.542,-1.768 220.234,-1.459 219.876,-1.208 219.48,-1.024 219.058,-0.91 218.623,-0.872 215.624,-0.872
  region net GND: 215.628,22.882 215.626,17.832 218.445,17.827 218.88,17.865 219.301,17.978 219.697,18.162 220.055,18.413 220.364,18.721 220.614,19.079 220.799,19.475 220.912,19.897 220.95,20.332 220.95,22.877
  region net GND: 250.128,13.999 251.563,13.999 251.563,13.784 ccw(c251.568,13.784) 251.568,13.779 252.668,13.779 ccw(c252.668,13.784) 252.674,13.784 252.674,13.999 254.205,13.999 ccw(c254.205,14.004) 254.211,14.004 ccw(c254.205,14.004) 254.205,14.01 252.674,14.01 252.674,14.284 ccw(c252.668,14.284) 252.668,14.29 252.324,14.29 252.324,14.684 ccw(c252.318,14.684) 252.318,14.69 251.918,14.69 ccw(c251.918,14.684) 251.913,14.684 251.913,14.29 251.568,14.29 ccw(c251.568,14.284) 251.563,14.284 251.563,14.01 250.128,14.01 ccw(c250.128,14.004)
  region net NetC2_2: 250.563,10.639 ccw(c250.568,10.639) 250.568,10.634 252.113,10.634 252.113,10.454 ccw(c252.118,10.454) 252.118,10.449 255.628,10.449 ccw(c255.628,10.454) 255.634,10.454 255.634,11.924 ccw(c255.628,11.924) 255.628,11.93 252.674,11.93 252.674,13.424 ccw(c252.668,13.424) 252.668,13.43 251.568,13.43 ccw(c251.568,13.424) 251.563,13.424 251.563,11.745 250.568,11.745 ccw(c250.568,11.739) 250.563,11.739
  region net GND: 244.663,8.279 ccw(c244.668,8.279) 244.668,8.274 245.013,8.274 245.013,7.879 ccw(c245.018,7.879) 245.018,7.874 245.418,7.874 ccw(c245.418,7.879) 245.424,7.879 245.424,8.274 245.768,8.274 ccw(c245.768,8.279) 245.774,8.279 245.774,8.779 ccw(c245.768,8.779) 245.768,8.785 244.668,8.785 ccw(c244.668,8.779) 244.663,8.779
  region net NetC3_1: 243.663,10.639 ccw(c243.668,10.639) 243.668,10.634 244.663,10.634 244.663,9.139 ccw(c244.668,9.139) 244.668,9.134 245.768,9.134 ccw(c245.768,9.139) 245.774,9.139 245.774,10.634 246.768,10.634 ccw(c246.768,10.639) 246.774,10.639 246.774,11.739 ccw(c246.768,11.739) 246.768,11.745 243.668,11.745 ccw(c243.668,11.739) 243.663,11.739
  region net GND: 232.898,8.337 ccw(c232.903,8.337) 232.903,8.332 233.153,8.332 ccw(c233.153,8.337) 233.159,8.337 233.159,8.734 237.038,8.734 237.038,8.337 ccw(c237.043,8.337) 237.049,8.337 237.049,8.739 ccw(c237.043,8.739) 237.043,8.745 236.649,8.745 236.649,13.634 237.043,13.634 ccw(c237.043,13.639) 237.049,13.639 ccw(c237.043,13.639) 237.043,13.645 233.153,13.645 ccw(c233.153,13.639) 233.153,13.634 233.548,13.634 233.548,8.745 233.153,8.745 ccw(c233.153,8.739) 233.148,8.739 233.148,8.343 232.909,8.343 232.909,8.739 ccw(c232.903,8.739) 232.903,8.745 232.048,8.745 ccw(c232.048,8.739) 232.048,8.734 232.898,8.734
  region net GND: 237.923,5.669 ccw(c237.928,5.669) 237.928,5.664 238.928,5.664 ccw(c238.928,5.669) 238.934,5.669 238.934,6.669 ccw(c238.928,6.669) 238.928,6.675 237.928,6.675 ccw(c237.928,6.669) 237.923,6.669
  region net GND: 230.888,3.349 ccw(c230.893,3.349) 230.893,3.344 231.893,3.344 ccw(c231.893,3.349) 231.899,3.349 231.899,4.349 ccw(c231.893,4.349) 231.893,4.355 230.893,4.355 ccw(c230.893,4.349) 230.888,4.349
  region net NetC5_2: 240.343,11.739 ccw(c240.348,11.739) 240.348,11.734 241.448,11.734 ccw(c241.448,11.739) 241.454,11.739 241.454,20.191 ccw(c241.448,20.191) 241.443,20.191 241.443,20.065 240.348,20.065 ccw(c240.348,20.059) 240.343,20.059
  region net NetC5_2: 237.038,10.299 ccw(c237.043,10.299) 237.043,10.294 238.448,10.294 ccw(c238.448,10.299) 238.454,10.299 238.454,10.634 239.623,10.634 239.623,9.439 ccw(c239.628,9.439) 239.628,9.434 242.168,9.434 ccw(c242.168,9.439) 242.174,9.439 242.174,10.634 243.168,10.634 ccw(c243.168,10.639) 243.174,10.639 243.174,11.739 ccw(c243.168,11.739) 243.168,11.745 238.454,11.745 238.454,12.079 ccw(c238.448,12.079) 238.448,12.085 237.043,12.085 ccw(c237.043,12.079) 237.038,12.079
  region net NetC1_2: 231.763,10.299 ccw(c231.768,10.299) 231.768,10.294 233.153,10.294 ccw(c233.153,10.299) 233.159,10.299 233.159,12.079 ccw(c233.153,12.079) 233.153,12.085 231.768,12.085 ccw(c231.768,12.079) 231.763,12.079
  region net NetC5_2: 231.728,20.054 cw(c231.728,20.059) 231.723,20.059 231.723,21.159 cw(c231.728,21.159) 231.728,21.165 240.48,21.165 cw(c240.48,21.159) 240.484,21.163 241.452,20.195 cw(c241.448,20.191) 241.454,20.191 241.454,20.059 cw(c241.448,20.059) 241.448,20.054 238.148,20.054 cw(c238.148,20.059) 238.143,20.059 238.143,20.704 233.134,20.704 233.134,20.059 cw(c233.128,20.059) 233.128,20.054
  region net NetC5_1: 227.928,16.654 cw(c227.928,16.659) 227.923,16.659 227.923,18.659 cw(c227.928,18.659) 227.928,18.665 228.823,18.665 228.823,20.191 cw(c228.828,20.191) 228.825,20.195 229.793,21.163 cw(c229.796,21.159) 229.796,21.165 231.228,21.165 cw(c231.228,21.159) 231.234,21.159 231.234,20.059 cw(c231.228,20.059) 231.228,20.054 229.934,20.054 229.934,16.659 cw(c229.928,16.659) 229.928,16.654
  region net NetC1_2: 227.958,8.519 ccw(c227.963,8.519) 227.963,8.514 229.893,8.514 ccw(c229.893,8.519) 229.899,8.519 229.899,10.634 231.763,10.634 231.763,10.299 ccw(c231.768,10.299) 231.768,10.294 232.048,10.294 ccw(c232.048,10.299) 232.054,10.299 232.054,12.079 ccw(c232.048,12.079) 232.048,12.085 231.768,12.085 ccw(c231.768,12.079) 231.763,12.079 231.763,11.745 229.934,11.745 229.934,14.659 ccw(c229.928,14.659) 229.928,14.665 227.928,14.665 ccw(c227.928,14.659) 227.923,14.659 227.923,12.465 226.428,12.465 ccw(c226.428,12.459) 226.423,12.459 226.423,9.919 ccw(c226.428,9.919) 226.428,9.914 227.958,9.914
  region net NetC38_1: 215.628,10.349 cw(c215.628,10.354) 215.623,10.354 215.623,12.024 cw(c215.628,12.024) 215.628,12.03 220.123,12.03 220.123,12.459 cw(c220.128,12.459) 220.128,12.465 222.628,12.465 cw(c222.628,12.459) 222.634,12.459 222.634,9.919 cw(c222.628,9.919) 222.628,9.914 220.128,9.914 cw(c220.128,9.919) 220.123,9.919 220.123,10.349

## Silkscreen, mask and mechanical layers (free items; w line width, h text height)
Top Solder:
  rectangle: 245.527,9.922 255.882,13.729
  rectangle: 215.355,2.067 256.161,23.356
  rectangle: 232.4,2.481 237.805,20.124
  rectangle: 227.959,16.656 230.187,21.413
  rectangle: 230.086,19.972 241.811,21.496
  rectangle: 240.102,14.395 241.844,20.073
  rectangle: 237.121,13.926 238.478,20.207
  region: 244.358,9.966 245.858,9.966 245.858,10.613 247.258,10.613 247.259,11.895 245.859,11.895 245.859,12.615 244.358,12.615
  region: 237.538,10.795 237.538,10.835 236.538,10.835 cw(c236.538,10.835) 236.538,10.835 236.538,11.855 cw(c236.538,11.855) 236.538,11.855 237.538,11.855 237.538,11.895 cw(c237.538,11.895) 237.538,11.895 240.988,11.895 240.988,12.615 cw(c240.988,12.615) 240.988,12.615 243.858,12.615 cw(c243.858,12.615) 243.859,12.615 243.859,10.075 cw(c243.858,10.075) 243.858,10.075 239.718,10.075 cw(c239.718,10.075) 239.718,10.075 239.718,10.795 237.538,10.795 cw(c237.538,10.795)
Bottom Solder:
  region: 234.161,1.179 236.919,-1.659 242.029,3.307 239.271,6.144
  region: 241.487,-1.28 241.487,1.595 238.612,1.595 238.612,-1.28
  region: 224.536,-4.572 226.21,-6.295 228.031,-4.526 226.357,-2.802
  rectangle: 215.375,-1.424 255.875,23.659
  rectangle: 215.375,-6.38 226.568,0.75
  rectangle: 230,-6.375 248,-4.242
  rectangle: 240.709,-6.375 255.875,0.75
  region: 235.048,0.206 237.806,-2.632 242.916,2.334 240.158,5.171
  rectangle: 237.812,-2.628 251.437,4.497
  rectangle: 222,-6.382 235.625,-4.064
  region: 234.183,-5.077 235.858,-6.8 237.945,-4.771 236.271,-3.048
  region: 230.84,-4.327 232.595,-6.132 233.911,-4.854 232.156,-3.048
  region: 236.3,-5.923 236.3,-3.048 232.156,-3.048 232.156,-5.923
Mechanical 1:
  lines w0.01: 215.375,-6.375 215.375,23.125 ; 215.375,-6.375 255.875,-6.375 255.875,23.125 215.375,23.125 ; 215.375,-6.375 215.375,23.125